# Altium PCB main.PcbDoc (part 8 of 8)
Units mil, origin at the board's own origin, x right, y up, seen from the top; angles counter-clockwise.
Board outline 3385.83 x 2362.2 mil, 8 copper layers (L1 (SIG), L2 (GND), L3 (SIG), L4 (GND), L5 (PWR), L6 (SIG), L7 (GND), L8 (SIG)), stack 46.958 mil thick; 318 components, 288 nets, 1482 pads, 1056 vias.
Unrouted connection lines stored in the file: 7.
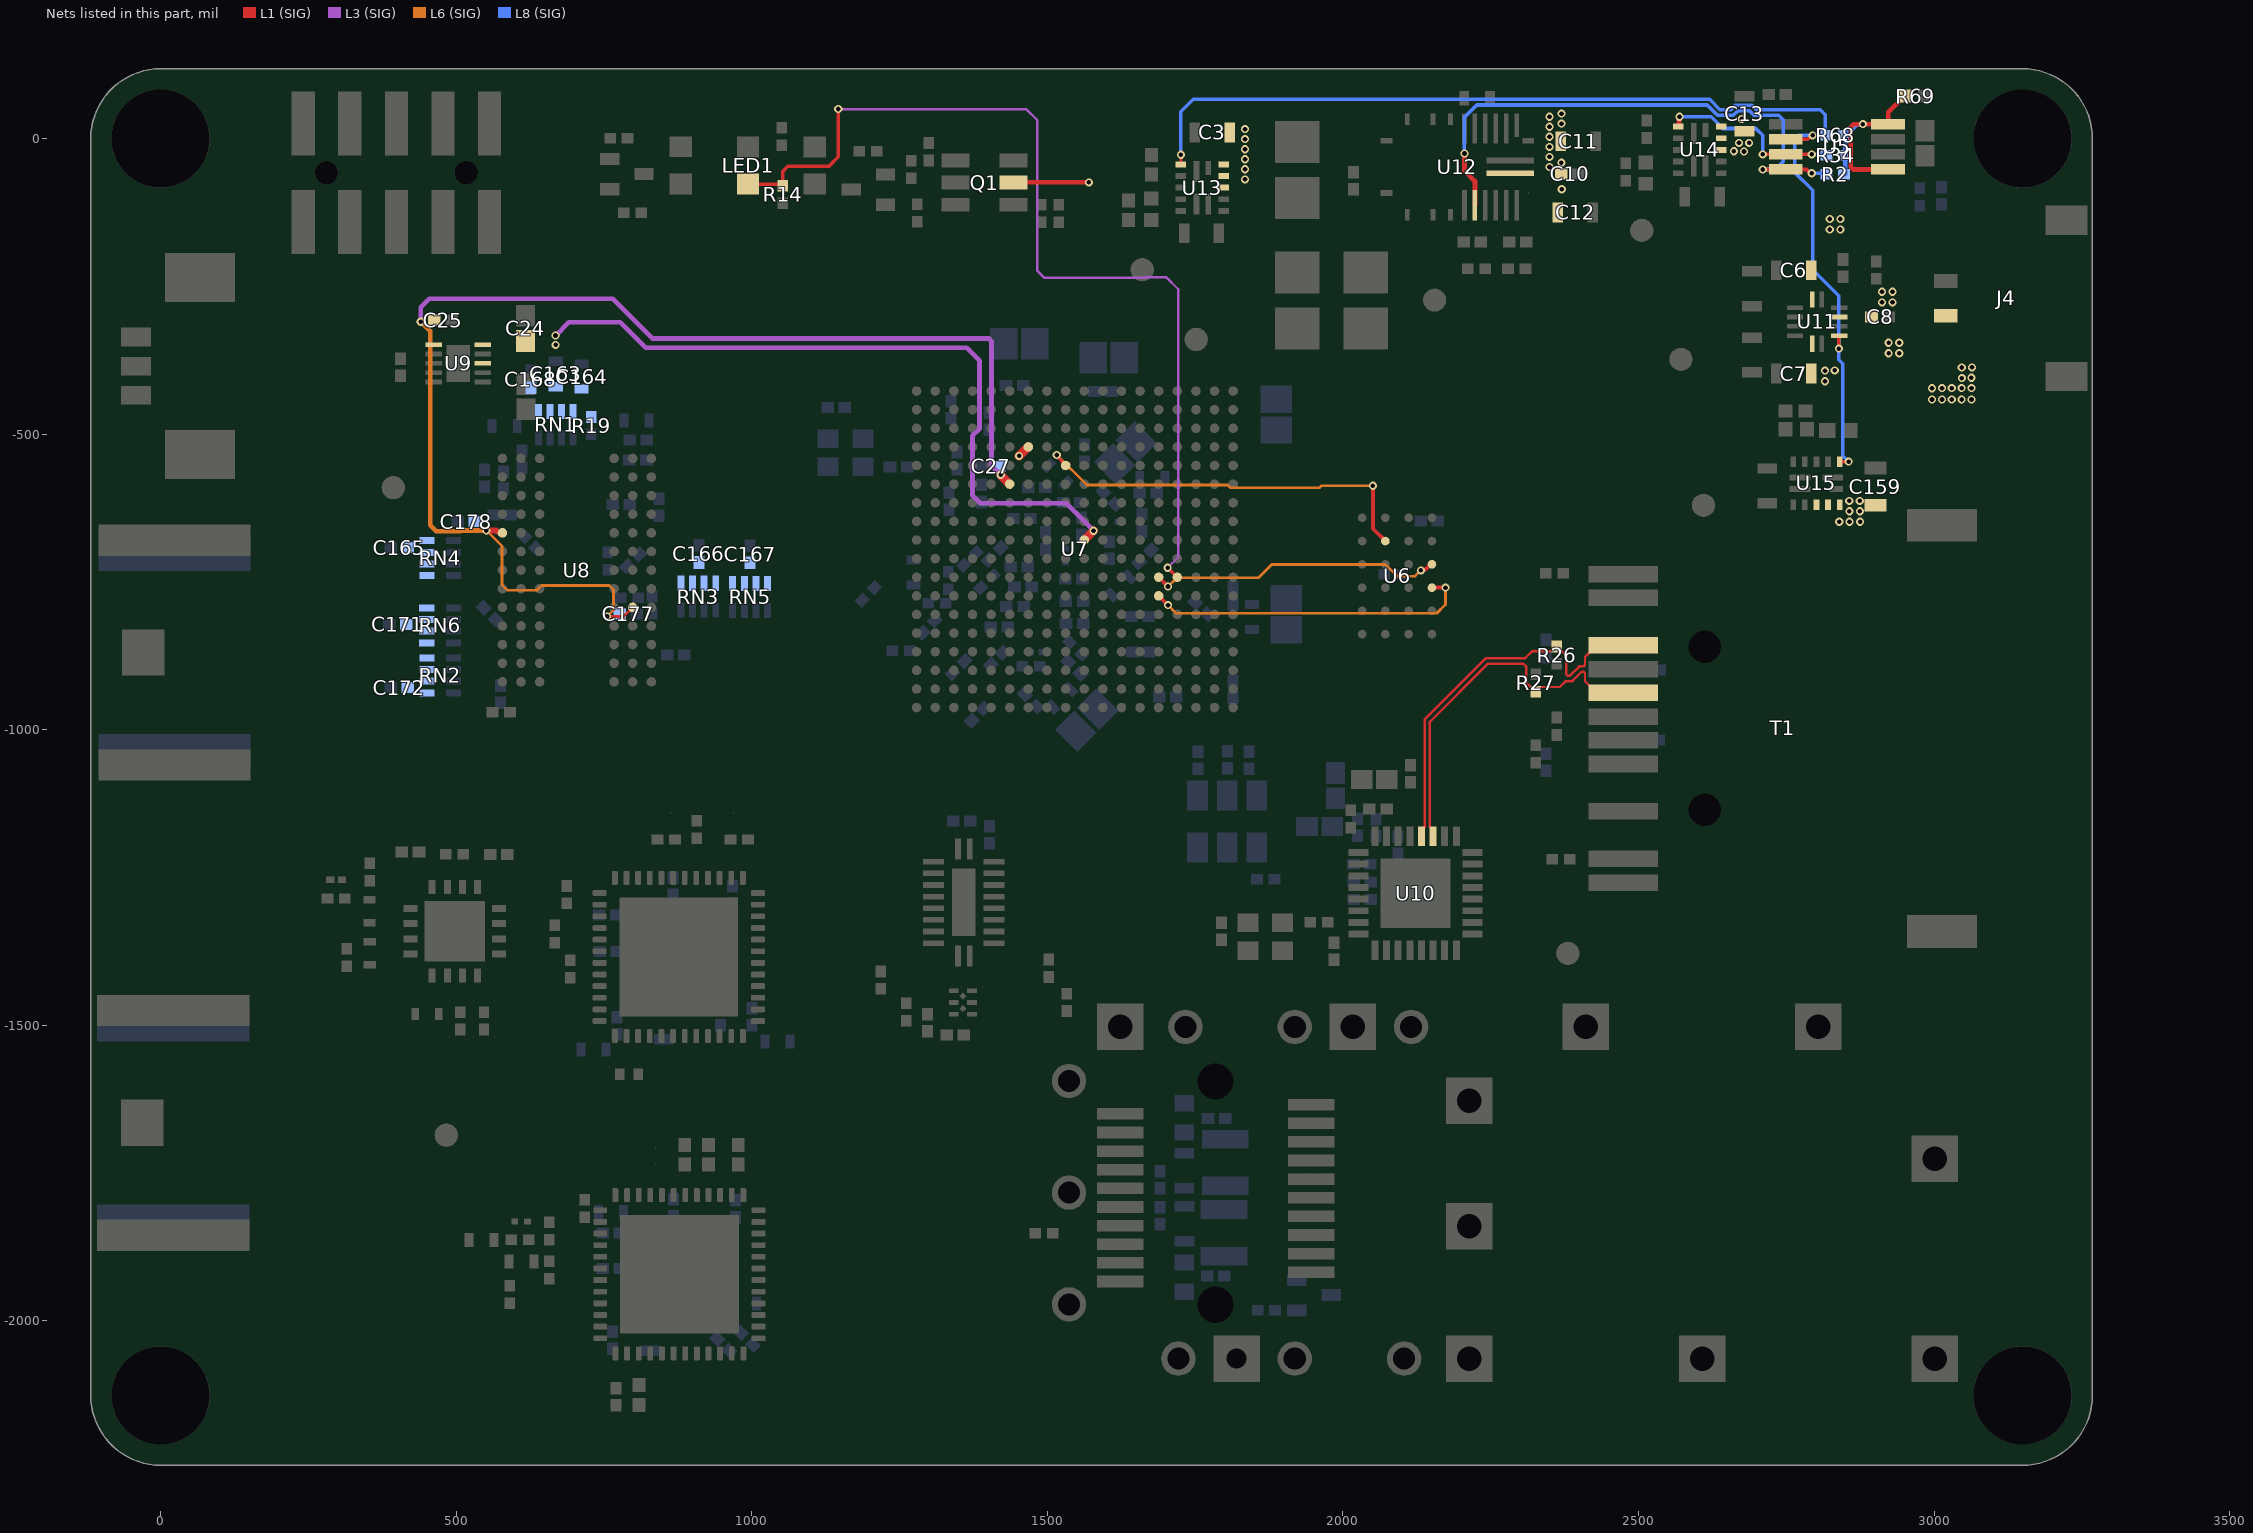
[diagram p12: the nets of this part, all layers, seen from the top]

## Via types
v1: diameter 13.78, hole 7.87, L1 (SIG) to L8 (SIG), tented both sides, 1033 vias
v2: diameter 13.78, hole 7.87, L1 (SIG) to L8 (SIG), 23 vias

## Nets (pads, with @x,y where several pads share a name; then routed paths per layer and width w, separated by ;. In a path a pad name is that pad's centre, name@x,y a point inside that pad or via, vN(x,y) a via of type N, cw(c..) or ccw(c..) an arc to the next point about the centre after c; other vN are vias at no path point) (continued)
SPI_DQ2: U6.C4 U7.L14 | length 500.8
  L1 (SIG) w6.41: U7.L14@1688.33,-742 v1(1704.07,-757.75) ; v1(2131.81,-730.38) 2133.22,-728.97 2139.52,-728.97 2148.34,-720.15 U6.C4@2150.55,-720.15
  L6 (SIG) w4.7: v1(1704.07,-757.75) 1718.83,-742.99 1856.8,-742.99 1879.47,-720.32 1921.45,-720.32 1939.28,-720.32 1992.75,-720.32 2071.98,-720.32 2091.81,-740.15 2121.86,-740.15 2131.62,-730.38 v1(2131.81,-730.38)
SPI_DQ3: U6.D4 U7.M14 | length 554.9
  L1 (SIG) w6.41: U7.M14@1688.33,-773.5 v1(1704.07,-789.25) ; U6.D4@2150.55,-759.52 2150.59,-759.56 2173.3,-759.56 v1(2173.34,-759.6)
  L6 (SIG) w4.7: v1(1704.07,-789.25) 1717.82,-802.99 1956.74,-802.99 2041.76,-802.99 2158.74,-802.99 2173.34,-788.39 v1(2173.34,-759.6)
SPI_SCK: U6.B2 U7.E9 | length 690.8
  L1 (SIG) w6.41: v1(1515.87,-535.24) 1515.87,-536.65 U7.E9@1531.22,-552 ; U7.E9@1530.85,-553.03 1533.63,-553.03 U7.E9@1536.09,-550.57 ; v1(2050.59,-587.31) 2050.99,-587.71 2050.99,-659.95 U6.B2@2071.81,-680.78
  L6 (SIG) w4.7: v1(1515.87,-535.24) 1566.82,-586.19 1805.24,-586.19 1809.82,-590.77 1960,-590.77 1963.46,-587.31 v1(2050.59,-587.31)
TD_N: R27.1 T1.3 U10.11 | length 637.6
  L1 (SIG) w4.11: U10.11@2152.44,-1180.15 2152.44,-1169.32 2147.15,-1164.03 2147.15,-986.36 2245.5,-888.01 2304.92,-888.01 2309.91,-892.99 2309.91,-920.07 R27.1@2326.29,-936.45 ; R27.1@2326.29,-937.43 R27.1@2326.29,-936.45 ; 2395.15,-910.34 2387.41,-918.07 2376.33,-918.07 2366.72,-927.68 2335.06,-927.68 R27.1@2326.29,-936.45 ; 2395.15,-910.29 2403.61,-901.83 2407.01,-901.83 2409.41,-904.23 2409.41,-917.91 2428.94,-937.43 T1.3@2474.02,-937.43
TD_P: R26.2 T1.1 U10.12 | length 657.6
  L1 (SIG) w4.11: U10.12@2132.76,-1180.15 2132.76,-1169.32 2138.05,-1164.03 2138.05,-982.58 2241.73,-878.9 2308.4,-878.9 2320.42,-866.88 2352.68,-866.88 R26.2@2361.45,-858.1 ; R26.2@2361.45,-857.12 R26.2@2361.45,-858.1 ; 2386.04,-906.56 2383.64,-908.97 2380.24,-908.97 2377.83,-906.56 2377.83,-874.48 R26.2@2361.45,-858.1 ; 2386.04,-906.52 2399.84,-892.72 2407.01,-892.72 2409.41,-890.32 2409.41,-876.65 2428.94,-857.12 T1.1@2474.02,-857.12
USER_LED: LED1.1 R14.1 U7.L15 | length 1617
  L1 (SIG) w6: LED1.1@993.89,-77.15 994.13,-76.9 1052.18,-76.9 1052.18,-55.71 1060.97,-46.93 ; 1061.3,-46.44 1130.79,-46.44 1146.28,-30.94 v1(1146.28,49.93) ; v1(1703.45,-726.05) 1703.87,-726.05 U7.L15@1719.82,-742
  L3 (SIG) w4: v1(1146.28,49.93) 1146.37,49.85 1464.13,49.85 1483.1,30.88 1483.1,-223.76 1494.5,-235.16 1666,-235.16 1666.76,-234.4 1700.93,-234.4 1721.37,-254.84 1721.37,-708.13 v1(1703.45,-726.05)
VCCAUX_EN: R34.2 U5.7 U14.3 | length 310.4
  L1 (SIG) w6: v1(2710.05,-26.69) U5.7@2748.94,-26.69 v1(2792.92,-26.69)
  L1 (SIG) w8: U14.3@2566.94,20.19 2567.38,20.19 2568.3,21.11 2568.3,35.9 v1(2569.41,37.01)
  L8 (SIG) w6: v1(2569.41,37.01) 2622.7,37.01 2642.7,17.01 2698.5,17.01 2710.05,5.46 v1(2710.05,-26.69) ; v1(2792.92,-26.69) 2814.64,-26.69 R34.2@2815.94,-27.99
VCCINT_EN: R2.2 U5.8 U12.16 | length 940.4
  L1 (SIG) w6: v1(2710.05,-52.28) U5.8@2748.94,-52.28 2784.59,-52.28 2790.86,-58.55 v1(2792.92,-58.55)
  L1 (SIG) w8: v1(2205.61,-25.33) 2205.61,-54.25 2223.19,-71.84 U12.16@2223.19,-112.94
  L8 (SIG) w6: v1(2205.61,-25.33) 2205.48,-25.2 2205.48,36 2226.27,56.79 2616.35,56.79 2633.63,39.51 2660.3,39.51 2667.52,46.73 2688.1,46.73 2695.32,39.51 2736.91,39.51 2744.41,32.01 2744.41,-39.18 2731.31,-52.28 v1(2710.05,-52.28) ; v1(2792.92,-58.55) 2813.89,-58.55 R2.2@2815.94,-60.6
VCCIO_EN: R68.2 U5.6 U11.1 U13.3 U15.3 | length 1962.3
  L1 (SIG) w5: U13.3@1725.91,-43.65 v1(1725.91,-27.44)
  L1 (SIG) w6: U5.6@2748.94,-1.1 2786.36,-1.1 2792.92,5.46 v1(2794.41,5.46) ; v1(2838.81,-355.25) 2838.81,-333.82 U11.1@2839.37,-333.26 ; U15.3@2840.32,-546.48 v1(2855.38,-546.48)
  L8 (SIG) w6: v1(1725.91,-27.44) 1725.91,45.5 1746.7,66.29 2620.29,66.29 2637.57,49.01 2656.37,49.01 2663.59,56.23 2692.04,56.23 2699.26,49.01 2807.41,49.01 2815.94,40.47 2815.94,5.46 v1(2794.41,5.46) 2770.97,5.46 2764.41,-1.1 2764.41,-57.34 2794.41,-87.34 2794.41,-221.69 2838.81,-266.09 v1(2838.81,-355.25) 2838.81,-374.26 2845.2,-380.65 2845.2,-536.31 v1(2855.38,-546.48)
VIN: C3.1 C6.1 C7.1 C8.2 C10.2 C11.1 C12.1 C13.1 C159.1 J4.1 Q1.2 R2.1 R34.1 R68.1 R69.1 U5.1 U5.4 U11.3 U11.6 U11.11 U12.22 U13.12 U13.13 U13.14 U14.12 U14.13 U14.14 U15.12 U15.13 U15.14 | length 490.7
  L1 (SIG) w7.87: Q1.2@1442.79,-74.51 1443.21,-74.09 v1(1570.27,-74.09) ; U5.1@2922.16,-52.28 2863.62,-52.28 2859.01,-47.67 2859.01,19.48 2864.03,24.49 v1(2879.41,24.49) U5.4@2922.16,24.49 2922.16,44.21 2949.96,72.01 R69.1@2950.94,72.01
  L8 (SIG) w7.87: v1@1833.28,14.88 v1(1834.41,16.01) ; R2.1@2849.41,-60.6 2849.41,-27.99 2849.41,5.46 2850.39,5.46 2868.3,23.36 2878.28,23.36 v1(2879.41,24.49)
  other v1: 2839.43,-648.02 2856.93,-648.02 2874.74,-648.02 2856.61,-630.41 2874.43,-630.41 2856.3,-612.79 2874.11,-612.79 2996.49,-441.43 3013.18,-441.43 3029.87,-441.43 3046.56,-441.43 3063.25,-441.43 2996.49,-422.27 3013.18,-422.13 3029.87,-422.13 3046.56,-422.13 3063.25,-422.13 2815.27,-410.45 3046.94,-405.25 3063.04,-404.63 2815.27,-392.56 2831.81,-392.01 3046.63,-387.16 3063.96,-387 2923.07,-363.23 2940.96,-363.23 2923.07,-345.34 2940.96,-345.34 2911.75,-277.02 2929.63,-277.02 2911.75,-259.13 2929.63,-259.13 2823.49,-153.89 2841.37,-153.89 2823.49,-136 2841.37,-136 2370.07,-85.63 1834.41,-68.99 1834.41,-51.99 2349.41,-47.99 2369.41,-40.99 1834.41,-34.99 2349.41,-30.99 2678.46,-21.87 2661.21,-21.44 1834.41,-17.99 2349.41,-13.99 2670,-7.34 2687,-7.34 1834.41,-0.99 2349.41,3.01 2349.41,20.01 2369.69,25.26 2674.64,33.34 2349.41,37.01 2369.69,42.26
VTT: C24.2 C163.1 C164.1 C165.2 C166.2 C167.2 C168.2 C171.2 C172.2 R19.1 RN1.1 RN1.2 RN1.3 RN1.4 RN2.1 RN2.2 RN2.3 RN2.4 RN3.1 RN3.2 RN3.3 RN3.4 RN4.1 RN4.2 RN4.3 RN4.4 RN5.1 RN5.2 RN5.3 RN5.4 RN6.1 RN6.2 RN6.3 RN6.4 U7.J10 U9.3 U9.5 | length 1238.9
  L1 (SIG) w15: U7.J10@1562.34,-679.01 v1(1578.09,-663.26)
  L3 (SIG) w8: v1(668.07,-333.23) 690.46,-310.84 777.54,-310.84 820.71,-354.01 1363.48,-354.01 1385.41,-375.94 1385.41,-490.65 1373.24,-502.82 1373.24,-603.7 1386.32,-616.78 1531.6,-616.78 1578.46,-663.63 v1@1578.46,-663.79
  other v1: 668.29,-349
VTTREF: C25.2 C27.2 C177.2 C178.1 U7.D7 U7.F6 U8.E1 U8.J8 U9.6 | length 2191.2
  L1 (SIG) w4.7: v1(755.41,-808.25) 783.28,-808.25 U8.J8@798.62,-792.91
  L1 (SIG) w10: v1(551.13,-662.83) 567.64,-662.83 569.87,-665.06 576.29,-665.06 U8.E1@578.15,-666.93
  L1 (SIG) w15: v1@1421.13,-569.14 U7.F6@1436.36,-584.37 ; v1(1452.21,-536.71) 1452.37,-536.71 1467.7,-521.38 U7.D7@1467.85,-521.38
  L3 (SIG) w8: v1@437.21,-310.85 440.13,-307.93 440.13,-285.54 454.73,-270.94 764.93,-270.94 832,-338.01 1400.8,-338.01 1405.49,-342.69 1405.49,-553.04 v1(1421.13,-568.69)
  L6 (SIG) w4.7: v1@552.38,-662.75 552.38,-664.08 577.53,-689.22 577.53,-754.84 586.69,-764 636.38,-764 644.58,-755.8 758.9,-755.8 766.14,-763.04 766.14,-797.52 v1(755.41,-808.25)
  L6 (SIG) w8: v1(440.21,-309.79) 456.1,-325.68 456.1,-654.08 466.01,-663.99 507.21,-663.99 508.37,-662.83 551.02,-662.83 v1@551.42,-662.43
  L8 (SIG) w6.41: 545.13,-658.82 549.98,-663.67 v1@550.46,-663.67
pads on no net: Fid1.0 Fid2.0 Fid3.0 Fid4.0 J3. J3.1 M1.21 M1.22 T1.MH1 T1.MH2 U3.3 U3.4 U3.11 U3.19 U3.20 U3.49@803.78,-1847.2 U3.49@803.78,-1896.41 U3.49@803.78,-1945.62 U3.49@803.78,-1994.84 U3.49@853,-1847.2 U3.49@853,-1896.41 U3.49@853,-1945.62 U3.49@853,-1994.84 U3.49@902.21,-1847.2 U3.49@902.21,-1896.41 U3.49@902.21,-1945.62 U3.49@902.21,-1994.84 U3.49@951.42,-1847.2 U3.49@951.42,-1896.41 U3.49@951.42,-1945.62 U3.49@951.42,-1994.84 U4.3 U4.11 U4.13 U4.21 U4.22 U4.49@802.86,-1310.62 U4.49@802.86,-1359.84 U4.49@802.86,-1409.05 U4.49@802.86,-1458.26 U4.49@852.08,-1310.62 U4.49@852.08,-1359.84 U4.49@852.08,-1409.05 U4.49@852.08,-1458.26 U4.49@901.29,-1310.62 U4.49@901.29,-1359.84 U4.49@901.29,-1409.05 U4.49@901.29,-1458.26 U4.49@950.5,-1310.62 U4.49@950.5,-1359.84 U4.49@950.5,-1409.05 U4.49@950.5,-1458.26 U6.A1 U6.A2 U6.A3 U6.A4 U6.B1 U6.C1 U6.C3 U6.D1 U6.E1 U6.E2 U6.E3 U6.E4 U6.F1 U6.F2 U6.F3 U6.F4 U7.A10 U7.A17 U7.B4 U7.B8 U7.B9 U7.C9 U7.C10 U7.C11 U7.C13 U7.D9 U7.D10 U7.D16 U7.G4 U7.G15 U7.H6 U7.H18 U7.J5 U7.K14 U7.L9 U7.L10 U7.L16 U7.L18 U7.M13 U7.M16 U7.M17 U7.N16 U7.P15 U7.R11 U7.R12 U7.R13 U7.T10 U8.A3 U8.A7 U8.F1 U8.F9 U8.H1 U8.H9 U10.22 U11.12 U12.7 U12.8 U12.13 U12.14 U12.15 U12.23 U13.1 U13.11 U14.1 U14.11 U15.1 U15.11 Y3.2

## Polygon pours and split planes (outlines as drawn)
+3V3 on L5 (PWR) "+3V3_L05_P004" (solid, pour order 4): 319.63,-1117.39 337.19,-1099.83 1004.62,-1099.83 1106.47,-997.99 1509.41,-997.99 1519.41,-987.99 1519.41,-952.99 1499.41,-932.99 1499.41,-877.99 1494.41,-872.99 1474.41,-872.99 1469.41,-867.99 1469.41,-851.4 1472.82,-847.99 1608.47,-847.99 1629.03,-827.43 1629.03,-786.52 1637.56,-777.99 1709.41,-777.99 1724.41,-762.99 1724.41,-497.77 1751.99,-470.2 2327.21,-470.2 2339.41,-457.99 2339.41,-312.99 2383.66,-268.74 2764.42,-268.74 2779.41,-283.73 2779.41,-424.31 2769.45,-434.27 2502.26,-434.27 2484.41,-452.13 2484.41,-1928.58 2330.86,-2082.13 795.84,-2082.13 664.41,-1950.69 664.41,-1207.99 653.83,-1197.41 345.88,-1197.41 319.63,-1171.17
+2V5 on L5 (PWR) "+2V5_L05_P006" (solid, pour order 6): 1414.41,-707.99 986.19,-707.99 959.35,-734.83 959.35,-892.24 906.99,-945.36 -38.04,-945.36 -86.12,-993.37 -86.12,-2199.07 -62.21,-2222.99 2734.41,-2222.99 2764.41,-2192.99 2764.41,-459.74 2744.45,-439.78 2505.87,-439.78 2489.07,-456.59 2489.07,-1932.11 2335.47,-2085.7 792.91,-2085.7 658.24,-1951.03 658.24,-1227.05 634.34,-1203.16 342.65,-1203.16 314.41,-1174.92 314.41,-1110.55 332.86,-1092.09 1001.65,-1092.09 1100.75,-992.99 1509.41,-992.99 1514.41,-987.99 1514.41,-957.99 1494.41,-937.99 1494.41,-882.99 1489.41,-877.99 1469.41,-877.99 1464.41,-872.99 1464.41,-862.99 1459.41,-857.99 1453.15,-857.99 1424.41,-829.26 1424.41,-717.99
VIN on L5 (PWR) "VIN_L05_P012" (solid, pour order 12): 2979.41,-282.14 2986.5,-289.23 3073.82,-289.23 3082.24,-297.65 3082.24,-631.43 3057.41,-656.26 2957.24,-657.48 2821.63,-657.48 2788.74,-624.6 2788.74,-151.04 2757.86,-120.16 1879.73,-120.16 1874.02,-125.86 1874.02,-149.49 1870.52,-152.99 1566.19,-152.99 1551.06,-137.86 1551.06,35.32 1567.75,52.01 2949.41,52.01 2979.41,22.01
+1V0 on L5 (PWR) "+1V0_L05_P000" (solid, remove dead copper, pour order 0): 1624.27,-824.05 1606.09,-842.23 1444.58,-842.23 1425.42,-823.07 1425.42,-556.87 1497.26,-485.02 1497.26,-321.31 1562.43,-256.14 1868.29,-256.14 1877.73,-246.7 1877.73,-199.92 1877.73,-123.91 1969.94,-123.91 1980.28,-134.25 1980.28,-378.94 1969.49,-389.73 1674.87,-389.73 1624.27,-440.34
+1V8 on L5 (PWR) "+1V8_L05_P002" (solid, pour order 2): 2378.62,-259.2 2329.41,-308.41 2329.41,-437.99 2306.39,-463.59 1749.65,-463.59 1717.09,-496.14 1717.09,-760.7 1704.27,-773.52 1637.58,-773.52 1627.95,-763.89 1627.95,-449.89 1682.27,-395.57 1976.83,-395.57 1984.41,-387.99 1984.41,-137.99 1999.41,-122.99 2464.41,-122.99 2748.85,-122.99 2782.54,-156.68 2782.54,-241.9 2765.24,-259.2
+1V35 on L5 (PWR) "+1V35_L05_P001" (solid, remove dead copper, pour order 1): 416.16,-654.45 416.16,-927.84 427.94,-939.61 902.34,-939.61 951.67,-890.28 951.67,-731.82 981.86,-702.17 1420.94,-702.17 1420.94,-554.07 1491.88,-483.12 1491.88,-319.25 1561.09,-250.04 1817.65,-250.04 1833.85,-233.84 1833.85,-171 1819.44,-156.59 557.05,-156.59 472.21,-241.44 416.16,-297.48
GND on L2 (GND) "GND_L02_P009" (solid, remove dead copper, pour order 9): -118.11,117.01 -118.11,-2242.99 3269.41,-2242.99 3269.41,117.01
GND on L4 (GND) "GND_L04_P010" (solid, remove dead copper, pour order 10): -118.11,117.01 -118.11,-2242.99 3269.41,-2242.99 3269.41,117.01
GND on L7 (GND) "GND_L07_P011" (solid, remove dead copper, pour order 11): -118.11,117.01 -118.11,-2242.99 3269.41,-2242.99 3269.41,117.01

## Other copper
L1 (SIG):
  region: 1329 vertices and 0 holes, not listed, extent 270.08,-2190.36 493.29,-1973.19
  region net GND: 2215.45,37.88 2215.92,-19.68 2323.41,-19.68 2334.78,-8.31 2334.78,57.66 2375.47,57.66 2389,44.14 2389,-147.98 2384.85,-152.13 2332.33,-152.13 2324.19,-143.99 2302.27,-143.99 2299.24,-147.02 2299.24,-186.05 2294.43,-190.87 2265.24,-190.87 2262.89,-188.51 2262.89,-88.57 2261.82,-87.5 2254.87,-87.5 2252.47,-87.48 2251.66,-88.29 2251.66,-193.19 2259.67,-201.2 2292.29,-201.2 2292.47,-201.02 2295.32,-203.88 2295.32,-211.72 2294.43,-212.61 2294.43,-242.55 2302.63,-250.75 2321.88,-250.75 2321.99,-250.63 2442.07,-250.44 2453.23,-239.28 2453.23,80.16 2449.62,83.77 2234.14,83.77 2226.12,75.75 2226.12,48.56
  region net +3V3: 2352.72,-1035.96 2370.92,-1017.93 2370.92,-999.57 2329.33,-999.57 2315.92,-1012.98 2315.92,-1035.96
  region net +3V3: 2778.62,-338.28 2778.62,-280.51 2764.49,-267.03 2667.57,-267.03 2661.15,-273.45 2661.15,-342.35 2671.21,-352.4 2764.49,-352.4
  region net +3V3: 2353.15,-915.18 2371.36,-897.15 2371.36,-878.79 2329.76,-878.79 2316.36,-892.2 2316.36,-915.18
  region net +3V3: 2086.15,-1146.43 2098.43,-1146.43 2100.86,-1148.86 2100.86,-1201.34 2098.67,-1203.54 2088.42,-1203.54 2086.33,-1201.45
  region net +3V3: 1789.38,-1278.97 1781.25,-1287.1 1781.25,-1319.42 1785.11,-1323.29 1862.56,-1323.29 1865,-1320.85 1865,-1299.71 1871.02,-1293.68 1995.71,-1293.68 2047.58,-1293.68 2049.84,-1291.42 2049.84,-1281.16 2047.65,-1278.97
  region net +3V3: 284.69,-400.47 272,-413.16 272,-448.82 272,-1154.92 307.16,-1190.08 353.75,-1190.08 376.6,-1167.23 376.6,-1001.98 341.15,-966.53 341.15,-449.38 347.17,-443.35 464.84,-443.35 475.9,-432.29 475.9,-388.53 435.37,-388.53 433.62,-386.78 433.62,-369.39 434.59,-368.42 475.9,-368.42 477.3,-367.01 477.3,-361.25 426.17,-361.25 421.5,-365.92 421.5,-386.5 420.4,-387.59 394.39,-387.59 379.99,-388.05 297.11,-388.05
  region net +3V3: 1341.08,-1212.99 1341.08,-1219.15 1342.91,-1220.98 1353.64,-1220.98 1355.81,-1218.81 1355.81,-1170.17 1353.41,-1167.77 1341.42,-1167.77 1337.43,-1171.77 1337.43,-1208.33 1341.1,-1211.99
  region net +3V3: 1241.81,-1477.02 1284.78,-1477.02 1291.91,-1469.89 1328,-1469.89 1330.49,-1472.38 1349.8,-1472.38 1357.27,-1464.92 1363.07,-1470.72 1363.07,-1472.86 1350.52,-1485.41 1343.64,-1485.41 1341.75,-1487.31 1341.75,-1524.87 1339.85,-1526.76 1319.59,-1526.76 1316.04,-1523.21 1316.04,-1497.12 1312.5,-1493.59 1279.9,-1493.59 1276.35,-1497.14 1276.35,-1507.57 1274.45,-1509.47 1240.92,-1509.47 1237.13,-1505.67 1237.13,-1481.74 1237.01,-1481.62
  region net +3V3: 979.68,-1532.78 979.68,-1507.98 982.96,-1504.7 1006.46,-1504.7 1009.69,-1507.92 1009.69,-1531.49 1005.3,-1535.88 982.78,-1535.88
  region net +3V3: 979.91,-2082.52 979.91,-2044.28 984.24,-2039.95 1012.46,-2039.95 1016.48,-2043.97 1016.48,-2075.74 1009.69,-2082.52
  region net +3V3: 752.32,-1307.22 755.04,-1309.94 755.04,-1320.94 751.02,-1324.95 711.34,-1324.95 708.17,-1321.78 708.17,-1310.26 711.21,-1307.22
  region net +3V3: 752.32,-1366.27 755.04,-1368.99 755.04,-1380 751.02,-1384.01 711.34,-1384.01 708.17,-1380.84 708.17,-1369.31 711.21,-1366.27
  region net +3V3: 822.02,-1506.1 831.84,-1506.1 837.66,-1511.93 837.66,-1545.66 833.06,-1550.26 821.58,-1550.26 817.73,-1545.66 817.73,-1510.4 818.65,-1509.48
  region net +3V3: 821.82,-2042.65 833.69,-2042.65 836.91,-2045.87 836.91,-2081.8 833.69,-2085.03 821.64,-2085.03 818.59,-2081.98 818.59,-2045.87
  region net VTTREF: 475.91,-352.83 442.07,-352.83 435.46,-346.22 435.46,-292.93 441.15,-286.34 470.88,-286.34 475.91,-291.36
  region net +1V35: 534.47,-391.67 531.07,-395.07 531.07,-426.65 540.45,-436.03 671.54,-436.03 671.57,-436.01 734.68,-436.01 746.19,-424.49 746.19,-328.37 741.44,-323.62 713.65,-323.62 707.23,-330.04 707.23,-377.08 698.83,-385.48 591.75,-385.48 585.56,-391.67
  region net +1V35: 1735.22,-98.09 1735.31,-98.18 1735.31,-108.24 1718.98,-108.24 1701.38,-125.84 1701.38,-181.07 1695.53,-186.91 1631.37,-186.91 1625.23,-180.77 1625.23,-125.38 1628.3,-122.31 1689.98,-122.31 1694.66,-117.63 1714.2,-98.09
  region net +1V35: 1809.84,-117.9 1778.97,-117.9 1778.97,-93.48 1765.53,-93.48 1765.53,-241.54 1834.41,-241.54 1834.41,-117.9
  region net GND: 2053.7,-1122.21 2057.33,-1125.84 2057.33,-1142.54 2054.61,-1145.26 2004.87,-1145.26 2002.32,-1142.72 2002.32,-1124.57 2004.68,-1122.21
  region net GND: 1346.5,-1364.22 1384.04,-1364.22 1396.49,-1376.67 1396.49,-1406.55 1391.87,-1411.16 1332.15,-1411.16 1327.72,-1406.73 1327.72,-1368.37 1331.86,-1364.22
  region net GND: 1336.58,-1232.85 1377.76,-1232.85 1381.12,-1236.21 1381.12,-1366.18 1373.28,-1374.02 1345.27,-1374.02 1333.78,-1362.54 1333.78,-1235.09
  region net GND: 481.71,-372.69 479.5,-374.91 448.96,-374.91 446.34,-377.52 446.34,-383.29 446.53,-383.29 448.24,-385 479.59,-385 481.71,-386.98 481.71,-468.81 498.69,-485.78 638.58,-485.78 643.62,-480.74 643.62,-445.6 637.86,-439.83 532.07,-439.83 523.2,-431.16 523.2,-373.85 527.84,-369.22 564.14,-369.22 566.62,-366.73 566.62,-363 564.17,-360.55 526.82,-360.55 523.55,-357.28 523.55,-334.29 526.33,-331.51 566,-331.51 579.62,-317.89 657.62,-317.89 666.04,-309.47 666.04,-266.2 657.89,-258.05 494.54,-258.05 481.71,-270.87
  region net GND: 2884.81,-107.97 2873.15,-119.64 2873.15,-179.14 2870.99,-181.21 2816.63,-181.21 2809.06,-188.78 2809.06,-210.8 2815.59,-217.34 2942.23,-217.34 2949.81,-224.91 2949.81,-286.86 2945.33,-290.8 2915.54,-290.8 2912.51,-293.83 2912.51,-310.64 2914.93,-313.05 2949.85,-313.05 2954.57,-317.78 2954.67,-326.55 2954.67,-371.01 2949.34,-376.35 2940.1,-376.43 2884.05,-376.43 2871.52,-363.9 2871.52,-315.45 2865.53,-309.47 2812.09,-309.47 2807.87,-313.68 2807.87,-321.63 2811.92,-325.68 2857.1,-325.68 2858.37,-326.95 2858.37,-380.27 2871.9,-393.8 2959.29,-393.8 2985.31,-393.8 2988.31,-390.8 2988.31,-279.52 3082.13,-279.52 3088.92,-286.01 3088.92,-545.48 3077.22,-557.18 3030.95,-557.18 3005.75,-582.38 3005.75,-617.64 3223.67,-617.64 3236.27,-605.05 3236.27,-440.45 3231.59,-435.77 3188.82,-435.77 3183.96,-430.91 3183.96,-116.23 3175.73,-107.97
  region net GND: 1684.41,-11.54 1674.41,-1.54 1639.41,-1.54 1629.41,-11.54 1629.41,-31.54 1639.41,-41.54 1674.41,-41.54 1684.41,-31.54
  region net GND: 1711.93,-179.63 1711.93,-209.86 1715.52,-213.45 1755.49,-213.45 1761.81,-207.13 1761.81,-30.22 1759.31,-27.71 1744.22,-27.71 1741.78,-30.15 1741.78,-50.84 1739.59,-53.03 1716.22,-53.03 1711.93,-48.74 1711.93,-15.2 1718.17,-8.97 1769.53,-8.97 1778.78,0.28 1778.78,43.98 1773.31,49.45 1623.96,49.45 1614.71,40.2 1614.71,-32.95 1624.81,-43.05 1690.55,-43.05 1694.6,-47.1 1694.6,-67.16 1700.6,-73.16 1736.35,-73.16 1739.59,-76.4 1739.59,-110.6 1733.51,-116.69 1717.56,-116.69 1712.08,-122.16 1712.08,-157.83
  region net GND: 1742.04,29.38 1732.04,39.38 1697.04,39.38 1687.04,29.38 1687.04,9.38 1697.04,-0.62 1732.04,-0.62 1742.04,9.38
  region net GND: 2099.41,-282.99 2094.41,-277.99 1884.41,-277.99 1879.41,-282.99 1879.41,-357.99 1884.41,-362.99 2094.41,-362.99 2099.41,-357.99
  region net GND: 2704.35,-532.5 2674.11,-532.5 2670.53,-536.09 2670.53,-578.93 2673.99,-582.38 2848.96,-582.38 2851.03,-580.31 2851.03,-564.87 2848.51,-562.35 2833.14,-562.35 2830.95,-560.16 2830.95,-536.79 2835.23,-532.5 2875.52,-532.5 2880.82,-537.81 2880.82,-595.92 2884.26,-599.35 2927.95,-599.35 2933.43,-593.88 2933.43,-444.53 2924.18,-435.28 2851.03,-435.28 2840.93,-445.38 2840.93,-511.12 2836.88,-515.17 2816.81,-515.17 2810.82,-521.17 2810.82,-556.92 2807.58,-560.16 2773.37,-560.16 2767.29,-554.08 2767.29,-538.13 2761.81,-532.66 2726.15,-532.66
  region net GND: 2764.23,-190.68 2774.34,-200.8 2774.52,-214.02 2774.52,-251.35 2764.94,-260.93 2664.72,-260.93 2656.13,-269.53 2656.13,-350.58 2665.46,-359.91 2756.09,-359.91 2768.37,-372.19 2768.37,-423.53 2761.01,-430.9 2623.71,-430.9 2605.78,-412.97 2605.78,-202.23 2617.32,-190.68
  region net GND: 1871.48,60.16 1881.01,69.69 2033.55,69.69 2046.97,56.28 2046.97,-58.13 2035.67,-69.43 1986.94,-69.43 1979.17,-61.66 1979.17,-43.3 1973.17,-37.3 1879.6,-37.3 1871.83,-29.53
  region net GND: 2710.8,83.85 2712.46,82.19 2712.46,60.33 2709.36,57.24 2561.56,57.24 2552.96,48.64 2552.96,15.1 2557.25,10.81 2580.62,10.81 2582.81,13 2582.81,33.7 2585.24,36.13 2600.34,36.13 2602.84,33.63 2602.84,-143.29 2596.52,-149.6 2556.54,-149.6 2552.96,-146.02 2552.96,-115.78 2553.11,-93.98 2553.11,-58.32 2558.59,-52.84 2574.54,-52.84 2580.62,-46.76 2580.62,-12.56 2577.38,-9.32 2541.63,-9.32 2535.63,-3.32 2535.63,16.74 2531.58,20.79 2465.84,20.79 2455.74,30.9 2455.74,80.31 2459.28,83.85
  region net GND: 1347.81,-1494.44 1365.5,-1476.74 1381.58,-1476.74 1382.94,-1478.1 1382.94,-1484.78 1382.94,-1532 1366.18,-1548.76 1289.97,-1548.76 1284.56,-1543.34 1284.67,-1509.95 1284.67,-1501.45 1287.99,-1498.12 1307.32,-1498.12 1310.46,-1501.26 1310.46,-1528.9 1315.73,-1534.17 1344.57,-1534.17 1347.81,-1530.94
  region net +2V5: 709.14,-1842.73 701.97,-1835.56 701.97,-1810.2 694.58,-1802.81 646.82,-1802.81 642,-1807.63 642,-1839.08 648.5,-1845.58 686.7,-1845.58 702.71,-1861.59 753.36,-1861.59 755.63,-1859.33 755.63,-1845.58 752.77,-1842.73
  region net +2V5: 687.3,-1901.78 673.96,-1915.13 645.76,-1915.13 643.41,-1917.48 643.41,-1948.16 648.38,-1953.14 682.24,-1953.14 684.2,-1951.17 684.2,-1937.51 701.06,-1920.65 753.36,-1920.65 755.63,-1918.38 755.63,-1904.64 752.77,-1901.78
  region net +2V5: 774.09,-2041.85 775.7,-2043.46 775.7,-2078.26 769.97,-2083.99 759.11,-2083.99 754.32,-2079.2 754.32,-2044.7 757.4,-2041.85
  region net +2V5: 956.79,-2045.85 959.65,-2042.99 973.39,-2042.99 975.66,-2045.26 975.66,-2079.39 972.26,-2082.78 961.45,-2082.78 956.79,-2078.13
  region net +2V5: 763.6,-1504.49 772.55,-1504.49 776.44,-1508.38 776.44,-1544.22 772.16,-1548.49 763.8,-1548.49 759.71,-1544.41 759.71,-1508.38
  region net +2V5: 877.15,-1796.18 874.29,-1799.04 860.55,-1799.04 858.29,-1796.78 858.29,-1762.65 861.69,-1759.25 872.49,-1759.25 877.15,-1763.91
  region net +2V5: 959.28,-1506.5 959.28,-1528.4 954.63,-1533.05 954.63,-1546.01 956.41,-1547.8 971.16,-1547.8 974.2,-1544.76 974.2,-1508.65 972.24,-1506.68
  region net +2V5: 859.2,-1211.16 867.03,-1211.16 876.91,-1221.03 876.91,-1262.22 874.85,-1264.28 858.02,-1264.28 856.38,-1262.63 856.38,-1214.46
  region net +2V5: 2766.08,-630.41 2766.08,-599.54 2790.5,-599.54 2790.5,-586.11 2620.84,-586.11 2620.84,-657.1 2766.08,-657.1
  region net +2V5: 2785.88,-555.79 2785.8,-555.88 2775.74,-555.88 2775.74,-539.55 2758.14,-521.95 2702.91,-521.95 2697.06,-516.1 2697.06,-451.94 2703.2,-445.8 2758.6,-445.8 2761.67,-448.87 2761.67,-510.55 2766.34,-515.23 2785.88,-534.77
  region net +2V5: 1363.68,-1183.36 1391.45,-1183.36 1397.33,-1189.24 1397.33,-1211.38 1394.77,-1213.94 1367.13,-1213.94 1363.93,-1210.74
  region net +1V0: 2107.75,55.01 2119.47,43.29 2119.9,36.68 2119.9,-158.91 2211.38,-158.91 2218.23,-165.75 2218.23,-264.34 2212.58,-269.99 1895.99,-269.99 1877.91,-251.91 1877.91,-81.31 1884.23,-74.99 2037.58,-74.99 2052.58,-59.99 2052.58,40.49 2067.23,55.14 2073.17,55.01
  region net VIN: 2339.41,-44.4 2339.41,48.58 2344.04,53.2 2374.89,53.2 2379.41,48.68 2379.41,-72.99 2383.7,-77.99 2383.7,-147.25 2339.41,-147.25 2339.41,-79.95 2331.83,-72.99 2240.22,-72.99 2240.22,-51.95 2331.86,-51.95
  region net VIN: 2634.41,-24.49 2639.55,-29.64 2690.05,-29.64 2694.41,-25.28 2694.41,47.01 2689.41,52.01 2639.41,52.01 2634.41,47.01
  region net VIN: 2825.46,-305.76 2871.03,-305.76 2878.48,-313.21 2904.58,-313.21 2904.58,-290.43 2904.54,-290.38 2878.22,-290.38 2870.77,-297.84 2825.46,-297.84
  region net VIN: 2805.08,-379.29 2837.36,-379.29 2840.32,-382.26 2840.32,-419.46 2834.99,-424.8 2782.26,-424.8 2778.73,-421.27 2778.73,-377.12 2787.97,-367.88 2787.97,-255.67 2781.99,-249.69 2781.99,-136.04 2781.99,-124.1 2787.97,-118.12 2859.01,-118.12 2867.89,-127 2867.89,-173.02 2864.03,-176.88 2809.84,-176.88 2804.54,-182.18 2804.54,-248.89 2801.28,-252.15 2801.28,-290.38 2808.73,-297.84 2860.3,-297.84 2864.03,-294.11 2864.03,-271.27 2870.92,-264.37 2891.97,-264.37 2904.19,-252.15 2941.95,-252.15 2945.81,-256 2945.81,-284.12 2944.34,-285.58 2909.35,-285.58 2904.54,-290.38 2904.58,-290.43 2904.58,-317.51 2945.11,-317.51 2949.41,-321.81 2949.41,-368.23 2945.27,-372.37 2885.79,-372.37 2875.86,-362.44 2875.86,-311.17 2870.45,-305.76 2805.08,-305.76 2801.62,-309.22 2801.62,-375.83
  region net VIN: 2995.19,-289.25 2998.33,-286.11 3076.63,-286.11 3081.72,-291.2 3081.09,-392.9 3081.09,-447.17 3080.86,-447.41 3080.86,-543.52 3072.57,-551.81 3027.83,-551.81 3000.13,-579.5 3000.13,-609.51 2991.37,-618.27 2957.45,-618.27 2918.22,-656.12 2794.86,-656.12 2794.86,-606.51 2857.1,-606.51 2879.84,-606.51 2932.36,-606.51 2943.11,-595.76 2943.11,-409.25 2950.42,-401.95 2992.79,-401.95 2995.19,-399.55
  region net VIN: 1849.41,-89.12 1849.41,34.24 1785.94,34.24 1785.94,-89.12
  region net +1V8: 2650.87,-54.06 2619.99,-54.06 2619.99,-29.64 2606.56,-29.64 2606.56,-168.86 2680.83,-168.86 2680.83,-54.06
  region net +1V8: 2576.25,-34.25 2576.33,-34.34 2576.33,-44.39 2560.01,-44.39 2542.41,-61.99 2542.41,-149.13 2531.93,-159.61 2478.27,-159.61 2466.26,-147.59 2466.26,-61.54 2469.33,-58.47 2531.01,-58.47 2535.69,-53.79 2555.23,-34.25
  region net VTT: 639.44,-363.44 634.37,-368.51 595.45,-368.51 595.35,-368.71 579.82,-384.24 531.09,-384.24 531.34,-374.83 566.09,-374.83 577.48,-363.44 577.48,-356.07 530.74,-356.07 528.49,-353.82 528.49,-341.41 531.93,-337.97 575.2,-337.97 590.82,-322.35 677.17,-322.35 679.33,-324.5 679.33,-355.52 671.4,-363.44
  region net NetC161_2: 2794.86,-556.07 2794.86,-531.03 2768.66,-504.83 2768.66,-452.37 2834.63,-452.37 2834.63,-508.72 2806.22,-508.72 2806.22,-556.07
  region net NetC17_2: 2576.52,-25.28 2551.48,-25.28 2525.28,-51.48 2472.83,-51.48 2472.83,14.49 2529.18,14.49 2529.18,-13.91 2576.52,-13.91
  region net NetC18_1: 2257.58,-204.99 2247.58,-194.99 2247.58,-87.35 2240.91,-87.35 2240.22,-87.35 2232.58,-87.35 2232.58,-153.91 2227.58,-158.91 2227.58,-234.99 2282.58,-234.99 2290.12,-227.44 2290.12,-204.99
  region net NetC5_2: 1735.49,-89.12 1710.45,-89.12 1684.25,-115.32 1631.8,-115.32 1631.8,-49.35 1688.15,-49.35 1688.15,-77.76 1735.49,-77.76
  region net NetC33_2: 2124.56,-1149.44 2120.37,-1153.64 2120.37,-1197.55 2117.22,-1200.7 2108.16,-1200.7 2105.01,-1197.55 2105.01,-1114.7 2101.2,-1111.06 2083.57,-1111.06 2080.85,-1113.78 2080.85,-1195.36 2078.26,-1197.94 2066.52,-1197.94 2063.94,-1195.36 2063.94,-1112.92 2057.37,-1106.35 2057.37,-1085.34 2065.67,-1077.03 2123.18,-1077.03 2124.56,-1078.41
L8 (SIG):
  drawing of 139 lines, arcs and shapes, not listed
Multi-Layer:
  rectangle net BODY: -0.79,90.55 3150.39,114.17
  region net BODY: -90.55,-1953.27 -114.17,-1953.27 -114.17,-2125.98 -90.55,-2125.98
  rectangle net BODY: 3240.94,-683.68 3264.57,0
  rectangle net BODY: -114.17,-634.86 -90.55,0
  region net BODY: 3264.68,-683.88 3264.68,-660.26 2784.25,-660.26 2784.25,-683.88
  region net BODY: 3151.18,-2216.54 0,-2216.54 0,-2240.16 3151.18,-2240.16
  region net BODY: 3264.57,-1309.87 3240.94,-1309.87 3240.94,-2125.98 3264.57,-2125.98
  rectangle net BODY: 2784.25,-1333.49 2807.87,-660.26
  region net BODY: 2784.25,-1309.87 2784.25,-1333.49 3264.57,-1333.49 3264.57,-1309.87
  rectangle net BODY: 2765.69,-1541.68 3266.16,-1462.38
  rectangle net BODY: 2962.54,-1764.9 3264.17,-1685.61
  rectangle net BODY: 2962.54,-2102.7 3264.17,-2023.41
  region net BODY: 3264.57,-2125.98 cw(c3150.39,-2125.98) 3150.39,-2240.16 3150.39,-2216.54 ccw(c3150.39,-2125.98) 3240.94,-2125.98
  region net BODY: -114.17,0 cw(c0,0) 0,114.17 0,90.55 ccw(c0,0) -90.55,0
  region net BODY: 3150.39,114.17 cw(c3150.39,0) 3264.57,0 3240.94,0 ccw(c3150.39,0) 3150.39,90.55
  region net BODY: 0,-2240.16 cw(c0,-2125.98) -114.17,-2125.98 -90.55,-2125.98 ccw(c0,-2125.98) 0,-2216.54
  lines w10 net BODY: 3025.19,-1343.95 3047.66,-1343.95

## Silkscreen, mask and mechanical layers (free items; w line width, h text height)
Top Overlay:
  drawing of 61 lines, arcs and shapes, not listed
  text "JTAG" at 717.78,-157.61 h70 r90
  text "1V8" at 2537.33,-188.4 h65
  text "1V3" at 1499.28,-254.43 h65
  text "DONE" at 912.74,-291.35 h65 r90
  text "USER" at 1027.26,-291.08 h65 r90
  text "PWR" at 1139.66,-291.08 h65 r90
  text "1V0" at 2186.81,-306.17 h65
  text "3V3" at 2410.6,-406.24 h65
  text "UART" at 196.41,-484.83 h70 r90
  text "PWR" at 3042.74,-493.97 h70
  text "2V5" at 2448.69,-653.2 h65
  text "FLASH" at 2279.41,-867.99 h70 r90
  text "DDR3L" at 931.08,-916.44 h70 r90
  text "ARTIX-7" at 1910.39,-961.79 h70 r90
  text "SDI IN" at -115.94,-1156.41 h70
  text "PHY" at 2301.81,-1360.55 h70 r90
  text "LAN" at 2498.71,-1387.99 h70
  text "DES" at 1108.22,-1509.83 h70 r90
  text "SDI OUT" at -117.06,-1953.01 h70
  text "SER" at 1104.04,-2044.95 h70 r90
  text "OPTICAL TRANSCEIVER" at 1562.8,-2171.62 h70
Top Solder:
  region: 1329 vertices and 0 holes, not listed, extent 270.08,-2190.36 493.29,-1973.19
Mechanical 1:
  drawing of 580 lines, arcs and shapes, not listed
  text "JLCPCB Code: JLC10121H-2116" at 4937.46,2171.24 h60
  text "Layer" at 4932.43,2022.94 h60
  text "Name" at 5342.35,2022.94 h60
  text "Material" at 6272.09,2022.94 h60
  text "Thickness" at 7131.86,2022.94 h60
  text "Constant" at 7781.69,2022.94 h60
  text "Board Layer Stack" at 8351.55,2022.94 h60
  text "Top Overlay" at 5342.35,1902.94 h60
  text "Top Solder" at 5342.35,1782.94 h60
  text "Solder Resist" at 6272.09,1782.94 h60
  text "0.60mil" at 7131.86,1782.94 h60
  text "3.8" at 7781.69,1782.94 h60
  text "1" at 4932.43,1662.94 h60
  text "L1 (SIG)" at 5342.35,1662.94 h60
  text "CF-004" at 6272.09,1662.94 h60
  text "1.38mil" at 7131.86,1662.94 h60
  text "Dielectric 1" at 5342.35,1542.94 h60
  text "NP-155F" at 6272.09,1542.94 h60
  text "3.91mil" at 7131.86,1542.94 h60
  text "4.1" at 7781.69,1542.94 h60
  text "2" at 4932.43,1422.94 h60
  text "L2 (GND)" at 5342.35,1422.94 h60
  text "CF-004" at 6272.09,1422.94 h60
  text "0.60mil" at 7131.86,1422.94 h60
  text "Dielectric 2" at 5342.35,1302.94 h60
  text "NP-155F" at 6272.09,1302.94 h60
  text "7.87mil" at 7131.86,1302.94 h60
  text "4.36" at 7781.69,1302.94 h60
  text "3" at 4932.43,1182.94 h60
  text "L3 (SIG)" at 5342.35,1182.94 h60
  text "CF-004" at 6272.09,1182.94 h60
  text "0.60mil" at 7131.86,1182.94 h60
  text "Dielectric 3" at 5342.35,1062.94 h60
  text "NP-155F" at 6272.09,1062.94 h60
  text "4.58mil" at 7131.86,1062.94 h60
  text "4.16" at 7781.69,1062.94 h60
  text "4" at 4932.43,942.94 h60
  text "L4 (GND)" at 5342.35,942.94 h60
  text "CF-004" at 6272.09,942.94 h60
  text "0.60mil" at 7131.86,942.94 h60
  text "Dielectric 4" at 5342.35,822.94 h60
  text "NP-155F" at 6272.09,822.94 h60
  text "7.87mil" at 7131.86,822.94 h60
  text "4.36" at 7781.69,822.94 h60
  text "5" at 4932.43,702.94 h60
  text "L5 (PWR)" at 5342.35,702.94 h60
  text "CF-004" at 6272.09,702.94 h60
  text "0.60mil" at 7131.86,702.94 h60
  text "Dielectric 5" at 5342.35,582.94 h60
  text "NP-155F" at 6272.09,582.94 h60
  text "4.58mil" at 7131.86,582.94 h60
  text "4.16" at 7781.69,582.94 h60
  text "6" at 4932.43,462.94 h60
  text "L6 (SIG)" at 5342.35,462.94 h60
  text "CF-004" at 6272.09,462.94 h60
  text "0.60mil" at 7131.86,462.94 h60
  text "Dielectric 6" at 5342.35,342.94 h60
  text "NP-155F" at 6272.09,342.94 h60
  text "7.87mil" at 7131.86,342.94 h60
  text "4.36" at 7781.69,342.94 h60
  text "7" at 4932.43,222.94 h60
  text "L7 (GND)" at 5342.35,222.94 h60
  text "CF-004" at 6272.09,222.94 h60
  text "0.60mil" at 7131.86,222.94 h60
  text "Dielectric 7" at 5342.35,102.94 h60
  text "NP-155F" at 6272.09,102.94 h60
  text "3.91mil" at 7131.86,102.94 h60
  text "4.1" at 7781.69,102.94 h60
  text "8" at 4932.43,-17.06 h60
  text "L8 (SIG)" at 5342.35,-17.06 h60
  text "CF-004" at 6272.09,-17.06 h60
  text "1.38mil" at 7131.86,-17.06 h60
  text "Bottom Solder" at 5342.35,-137.06 h60
  text "Solder Resist" at 6272.09,-137.06 h60
  text "0.60mil" at 7131.86,-137.06 h60
  text "3.8" at 7781.69,-137.06 h60
  text "Bottom Overlay" at 5342.35,-257.06 h60
  text "Total board thickness:" at 4932.43,-377.06 h60
  text "48.16mil" at 7131.86,-377.06 h60

## Text inside footprints (layer, text, board x,y; h text height)
J1: Mechanical 13 "PCB Edge" at -105.37,-1115.66 h50 r270
J2: Mechanical 13 "PCB Edge" at -107.22,-1910.88 h50 r270
Q1: Top Assembly "1" at 1420.61,-106.85 h39.37 r270
U1: Top Assembly "1" at 1343.75,-1212.09 h39.37
U2: Top Assembly "1" at 432.75,-1305.87 h27.56 r90
U3: Top Assembly "1" at 977.6,-1811.02 h39.37
U4: Top Assembly "1" at 976.68,-1274.44 h39.37
U5: Top Assembly "1" at 2915.55,-48.89 h27.56 r270
U10: Top Assembly "1" at 2212.91,-1341.61 h27.56 r270
U11: Top Assembly "1" at 2826.96,-329.64 h27.56 r270
U12: Top Assembly "1" at 2288.67,2.02 h27.56
U13: Top Assembly "1" at 1767.33,-63.02 h39.37
U14: Top Assembly "1" at 2608.36,0.82 h39.37
U15: Top Assembly "1" at 2820.95,-587.9 h39.37 r270
Y3: Bottom Assembly "1" at 1849.36,-1170.54 h39.37 r180